# Altium PCB PCB2.PcbDoc
Units mil, origin at the board's own origin, x right, y up, seen from the top; angles counter-clockwise.
Board outline 4665 x 2010 mil, 2 copper layers (Top Layer, Bottom Layer); 13 components, 0 nets, 112 pads, 0 vias.
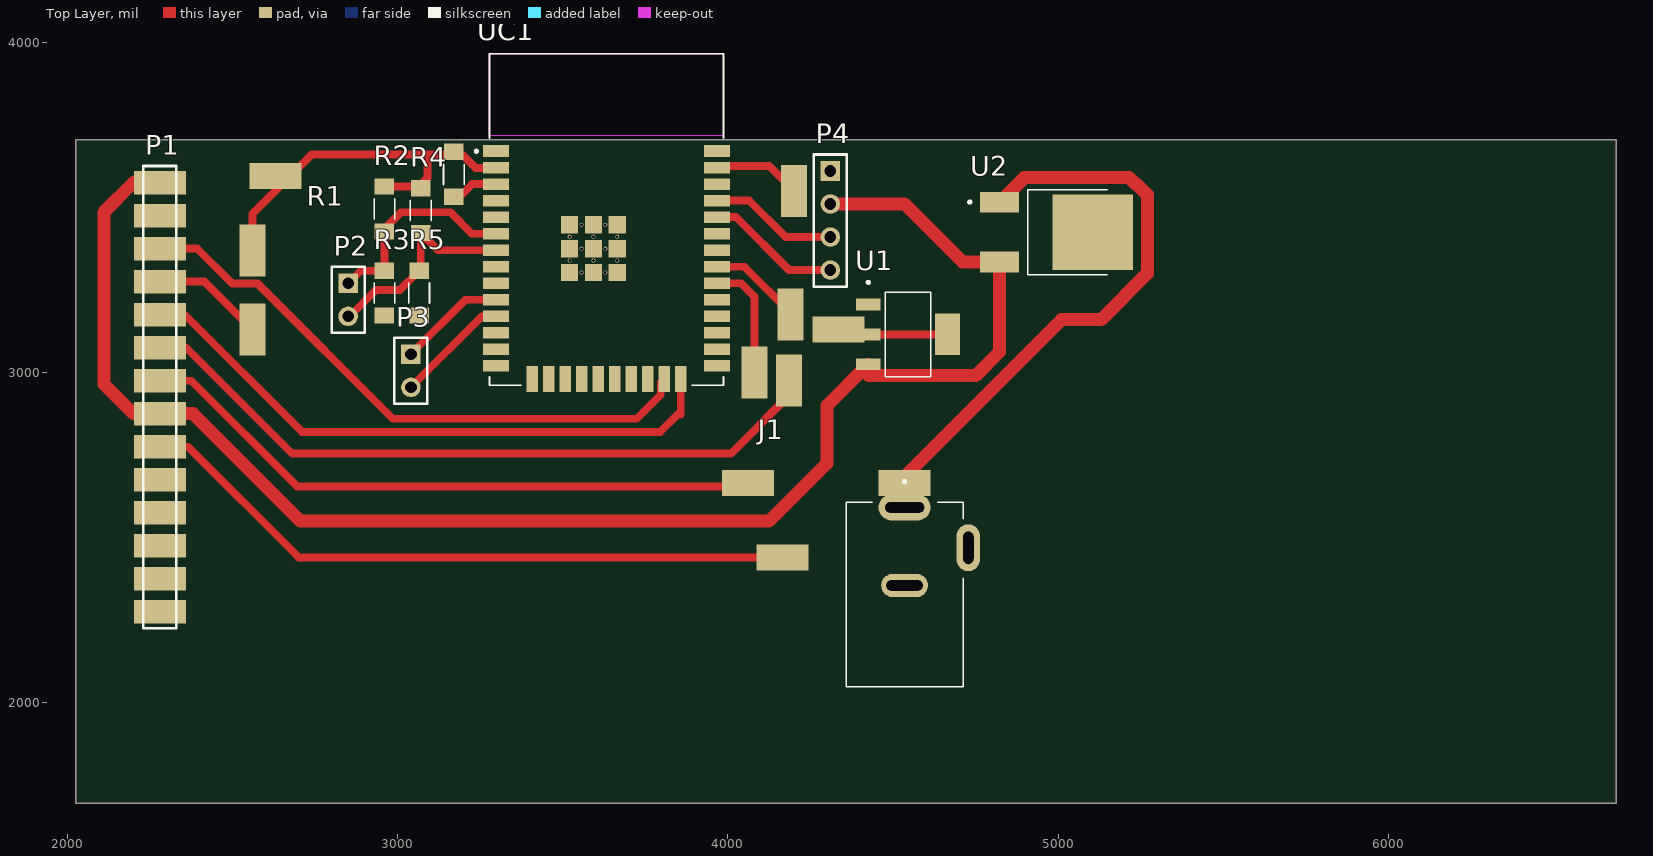
[diagram p0: Top Layer view]
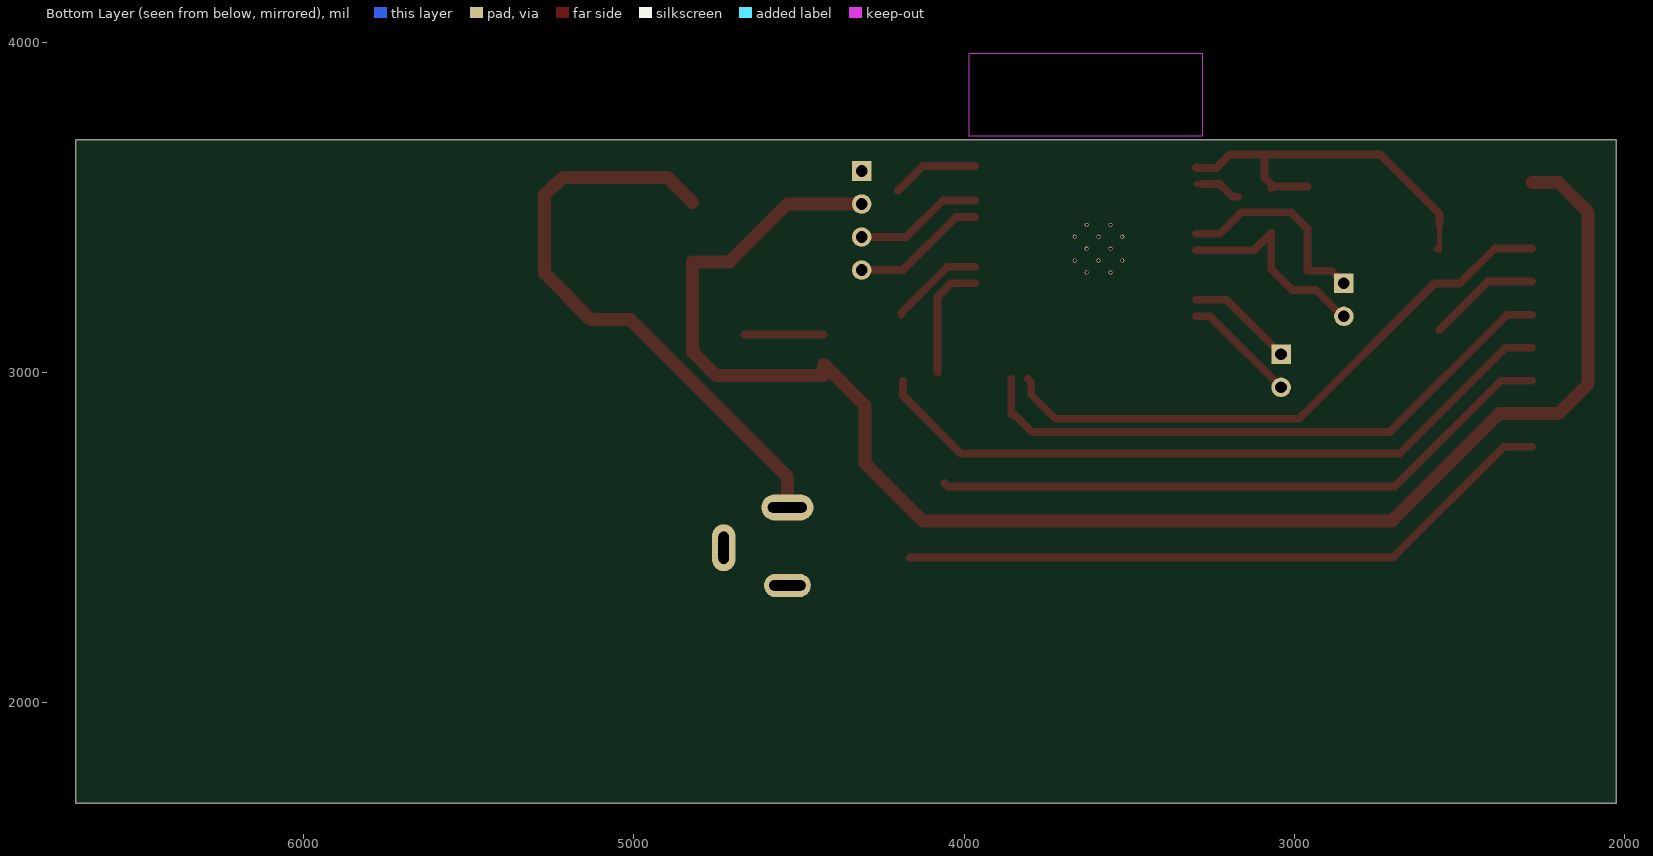
[diagram p1: Bottom Layer view, seen from below]

## Layer stack, top to bottom
Top Solder: solder mask 0.4, Solder Resist, Dk 3.5
Top Layer: signal copper 1.4
Dielectric 1: dielectric 12.6, FR-4, Dk 4.8
Bottom Layer: signal copper 1.4
Bottom Solder: solder mask 0.4, Solder Resist, Dk 3.5

## Board outline
2025,1695 6690,1695 6690,3705 2025,3705

## Design rules (kind name [scope] priority, off if disabled: settings)
Clearance [All] p1: gap=10 ignorepadtopadclearanceinfootprint=FALSE except(0: Arc-Hole Track-Hole SMDPad-Hole THPad-Hole Via-Hole Fill-Hole Poly-Hole Region-Hole Text-Hole)
PolygonConnect [All] p1: connectstyle=Relief reliefconductorwidth=10 reliefentries=4 polygonreliefangle="90 Angle" airgapwidth=10
RoomDefinition Sheet1 [InComponentClass('Sheet1')] p1: confinementstyle=ConfineIn formatcopy=TRUE lockcomponents=FALSE outline 2025,1700 6685,1700 6685,3705 2025,3705
RoutingVias [All] p1: holewidth=28 width=50 viastyle="Through Hole" minholewidth=28 minwidth=50 maxholewidth=28 maxwidth=50
SolderMaskExpansion [All] p1: expansion=4
Width [All] p1: maxlimit=10 minlimit=10 preferedwidth=10
30 further rules are at their usual default settings.

## Components (designator, comment, footprint, x,y, rotation, side; value= is the part's Value field where it differs from the comment)
J1 "PJ-050AH" CUI_PJ-050AH 4535,2591.22 r270 top
P1 "Header 14" HDR1X14 2280,3575 r270 top
P2 "ADC" HDR1X2 2850,3270 r270 top
P3 "DAC" HDR1X2 3040,3055 r270 top
P4 "Header 4" HDR1X4 4310,3610 r270 top
R1 "ERJU08J274V" RES_ERJU08J274V 3170,3600 r90 top
R2 "ERJU08J274V" RES_ERJU08J274V 2960,3495 r90 top
R3 "ERJU08J274V" RES_ERJU08J274V 2960,3240 r90 top
R4 "ERJU08J274V" RES_ERJU08J274V 3070,3490 r90 top
R5 "ERJU08J274V" RES_ERJU08J274V 3065,3240 r90 top
U1 "AP2111H-3.3TRG1" SOT230P700X180-4N 4545,3115 r270 top
U2 "MC78M05ABDTG" VREG_MC78M05ABDTG 4995.16,3425 r0 top
UC1 "ESP32-WROOM-32" MODULE_ESP32-WROOM-32 3632.13,3463.19 r0 top

## Footprints (in the part's own frame and the unit in brackets; to place one, negate y for a bottom-side part, rotate by r counter-clockwise, add the part's x,y. Pads: shape width x height; smd on the part's side, far side on the other; paste and mask are expansions set on the pad)
CUI_PJ-050AH [mm]
  oval 2x4 hole 0.8 slot 3 at 90 deg: 1(0,0)
  oval 1.8x3.6 hole 0.8 slot 2.8 at 90 deg: 2(6,0)
  oval 3.6x1.8 hole 0.8 slot 2.5 at 0 deg: 3(3.1,4.9)
  silkscreen extent -2.1,-4.5 13.8,4.5, body extent -4.5,-11.53 5.05,2.67, height 10.97
HDR1X2 [mm] "Connector; Header; 2 Position"
  rect 1.5x1.5 hole 0.9: 1(0,0)
  round 1.5 hole 0.9: 2(2.54,0)
  silkscreen extent -1.27,-1.27 3.81,1.27
HDR1X4 [mm] "Connector; Header; 4 Position"
  rect 1.5x1.5 hole 0.9: 1(0,0)
  round 1.5 hole 0.9: 2(2.54,0) 3(5.08,0) 4(7.62,0)
  silkscreen extent -1.27,-1.27 8.89,1.27
HDR1X14 [mm] "Connector; Header; 14 Position"
  rect 1.8x4 smd: 1(0,0) 2(2.54,0) 3(5.08,0) 4(7.62,0) 5(10.16,0) 6(12.7,0) 7(15.24,0) 8(17.78,0) 9(20.32,0) 10(22.86,0) 11(25.4,0) 12(27.94,0) 13(30.48,0) 14(33.02,0)
  silkscreen extent -1.27,-1.27 34.29,1.27
MODULE_ESP32-WROOM-32 [mm]
  rect 2x0.9 smd: 1(-8.5,5.26) 2(-8.5,3.99) 3(-8.5,2.72) 4(-8.5,1.45) 5(-8.5,0.18) 6(-8.5,-1.09) 7(-8.5,-2.36) 8(-8.5,-3.63) 9(-8.5,-4.9) 10(-8.5,-6.17) 11(-8.5,-7.44) 12(-8.5,-8.71) 13(-8.5,-9.98) 14(-8.5,-11.25) 25(8.5,-11.25) 26(8.5,-9.98) 27(8.5,-8.71) 28(8.5,-7.44) 29(8.5,-6.17) 30(8.5,-4.9) 31(8.5,-3.63) 32(8.5,-2.36) 33(8.5,-1.09) 34(8.5,0.18) 35(8.5,1.45) 36(8.5,2.72) 37(8.5,3.99) 38(8.5,5.26)
  rect 0.9x2 smd: 15(-5.715,-12.25) 16(-4.445,-12.25) 17(-3.175,-12.25) 18(-1.905,-12.25) 19(-0.635,-12.25) 20(0.635,-12.25) 21(1.905,-12.25) 22(3.175,-12.25) 23(4.445,-12.25) 24(5.715,-12.25)
  rect 1.33x1.33 smd: 39_1(-2.835,-0.405) 39_2(-1,-0.405) 39_3(0.835,-0.405) 39_4(-2.835,-2.24) 39_5(-1,-2.24) 39_6(0.835,-2.24) 39_7(-2.835,-4.075) 39_8(-1,-4.075) 39_9(0.835,-4.075)
  round 0.3 hole 0.2: 39_10(-1.917,-0.405) 39_11(-0.082,-0.405) 39_12(-2.835,-1.322) 39_13(-1,-1.322) 39_14(0.835,-1.322) 39_15(-1.917,-2.24) 39_16(-0.082,-2.24) 39_17(-2.835,-3.157) 39_18(-1,-3.157) 39_19(0.835,-3.157) 39_20(-1.917,-4.075) 39_21(-0.082,-4.075)
  Keep-Out Layer region: 9,6.45 -9,6.45 -9,12.75 9,12.75
  Keep-Out Layer region: 9,6.45 -9,6.45 -9,12.75 9,12.75
  silkscreen extent -10.1,-12.75 9,12.75, body extent -9,-12.75 9,12.75, height 3.2
RES_ERJU08J274V [mm]
  rect 1.25x1.5 smd: 1(-1.725,0) 2(1.725,0)
  silkscreen extent -0.78,-0.8 0.78,0.8
SOT230P700X180-4N [mm]
  rect 0.9x1.91 smd: 1(-2.3,-3.05) 2(0,-3.05) 3(2.3,-3.05)
  rect 3.19x1.91 smd: 4(0,3.05)
  silkscreen extent -4.1,-3.15 3.25,1.75, body extent -3.5,-3.25 3.5,3.25, height 1.65
VREG_MC78M05ABDTG [mm]
  rect 3x1.6 smd: 1(-4.39,2.29) 3(-4.39,-2.29)
  rect 6.2x5.8 smd paste-4: 2_4(2.79,0)
  silkscreen extent -6.78,-3.27 3.87,3.27

## Part data
J1: "2.0 x 6.0 mm, 5.0 A, Horizontal, Through Hole, Pick-n-Place Top, Dc Power Jack Connector", Package=None, Check_prices=https://www.snapeda.com/parts/PJ-050AH/Same+Sky/view-part/?ref=eda, MF="Same Sky", MP=PJ-050AH, SnapEDA_Link=https://www.snapeda.com/parts/PJ-050AH/Same+Sky/view-part/?ref=snap
P1: "Header, 14-Pin", LatestRevisionDate=17-Jul-2002, LatestRevisionNote="Re-released for DXP Platform.", Publisher="Altium Limited"
P2 P3: library part "Header 2", "Header, 2-Pin", LatestRevisionDate=17-Jul-2002, LatestRevisionNote="Re-released for DXP Platform.", Publisher="Altium Limited"
P4: "Header, 4-Pin", LatestRevisionDate=17-Jul-2002, LatestRevisionNote="Re-released for DXP Platform.", Publisher="Altium Limited"
R1 R2 R3 R4 R5 U2: Package=None, Availability=Unavailable, Price=None
  R1 R2 R3 R4 R5: MP=ERJU08J274V
  U2: MF="{'manufacturer': u'onsemi'}", MP=MC78M05ABDTG
U1: "Voltage Regulators, LDO, 600mA CMOS LDO 50mA 3.3V 250mV", Package="SOT-223 Diodes Inc.", Check_prices=https://www.snapeda.com/parts/AP2111H-3.3TRG1/Diodes+Inc./view-part/?ref=eda, MF="Diodes Inc.", MP=AP2111H-3.3TRG1, SnapEDA_Link=https://www.snapeda.com/parts/AP2111H-3.3TRG1/Diodes+Inc./view-part/?ref=snap
UC1: "Bluetooth, WiFi 802.11b/g/n, Bluetooth v4.2 +EDR, Class 1, 2 and 3 Transceiver Module 2.4GHz ~ 2.5GHz Antenna Not Included, U.FL Surface Mount", Package="Module Espressif Systems", Availability="In Stock", Check_prices=https://www.snapeda.com/parts/ESP32-WROOM-32/Espressif+Systems/view-part/?ref=eda, MF="Espressif Systems", MP=ESP32-WROOM-32, Price=None, Purchase-URL=https://pricing.snapeda.com/search/part/ESP32-WROOM-32/?ref=eda, SnapEDA_Link=https://www.snapeda.com/parts/ESP32-WROOM-32/Espressif+Systems/view-part/?ref=snap

## Free pads (board coordinates)
  rect 78.74x157.48 smd: 2(2560,3130) 3(2560,3370) 4(4200,3550) 5(4185,2975) 6(4190,3175) 7(4080,3000)
  rect 157.48x78.74 smd: 8(4060,2665) 9(4165,2440) 10(4335,3130) 11(2630,3595) 12(4535,2665)

## Nets (pads, with @x,y where several pads share a name; then routed paths per layer and width w, separated by ;. In a path a pad name is that pad's centre, name@x,y a point inside that pad or via, vN(x,y) a via of type N, cw(c..) or ccw(c..) an arc to the next point about the centre after c; other vN are vias at no path point)
pads on no net: J1.1 J1.2 J1.3 P1.1 P1.2 P1.3 P1.4 P1.5 P1.6 P1.7 P1.8 P1.9 P1.10 P1.11 P1.12 P1.13 P1.14 P2.1 P2.2 P3.1 P3.2 P4.1 P4.2 P4.3 P4.4 R1.1 R1.2 R2.1 R2.2 R3.1 R3.2 R4.1 R4.2 R5.1 R5.2 U1.1 U1.2 U1.3 U1.4 U2.1 U2.2_4 U2.3 UC1.1 UC1.2 UC1.3 UC1.4 UC1.5 UC1.6 UC1.7 UC1.8 UC1.9 UC1.10 UC1.11 UC1.12 UC1.13 UC1.14 UC1.15 UC1.16 UC1.17 UC1.18 UC1.19 UC1.20 UC1.21 UC1.22 UC1.23 UC1.24 UC1.25 UC1.26 UC1.27 UC1.28 UC1.29 UC1.30 UC1.31 UC1.32 UC1.33 UC1.34 UC1.35 UC1.36 UC1.37 UC1.38 UC1.39_1 UC1.39_2 UC1.39_3 UC1.39_4 UC1.39_5 UC1.39_6 UC1.39_7 UC1.39_8 UC1.39_9 UC1.39_10 UC1.39_11 UC1.39_12 UC1.39_13 UC1.39_14 UC1.39_15 UC1.39_16 UC1.39_17 UC1.39_18 UC1.39_19 UC1.39_20 UC1.39_21
copper on no net: | length 21982.9
  Top Layer w15.75: 2560,3450 2560,3370 2571.14,3373.39 2570.08,3375.38 2567.73,3377.73 ; 2960,3562.91 2965,3557.91 ; 3070,3557.91 3070,3570 ; 3280,3570.28 3297.48,3570.28
  Top Layer w23.62: 2280,2775 2365,2775 2700,2440 4165,2440 ; 2280,2975 2375,2975 2695,2655 4050,2655 4060,2665 ; 2280,3075 2360,3075 2680.75,2754.25 4009.25,2754.25 4185,2930 4185,2975 ; 2280,3175 2355,3175 2710,2820 3795,2820 3847.87,2872.87 3857.13,2872.87 3857.13,2980.91 ; 2280,3275 2415,3275 2560,3130 ; 2280,3375 2393.27,3375 2498.82,3269.45 2575.55,3269.45 2985,2860 3724.15,2860 3796.65,2932.5 3796.65,2970.43 3807.13,2980.91 ; 2560,3450 2560,3480 2740,3660 3090,3660 ; 2850,3170 2855,3170 2935,3250 3007.09,3250 3065,3307.91 3070,3312.91 3070,3422.09 3121.81,3370.28 3297.48,3370.28 ; 2850,3270 2887.91,3307.91 2960,3307.91 2960,3427.09 2960,3435 3010,3485 3160,3485 3224.72,3420.28 3297.48,3420.28 ; 2960,3562.91 3065,3562.91 3070,3557.91 ; 3040,2955 3255.28,3170.28 3297.48,3170.28 ; 3040,3055 3205.28,3220.28 3297.48,3220.28 ; 3070,3570 3090,3590 3090,3660 ; 3170,3532.09 3187.09,3532.09 3225.28,3570.28 3280,3570.28 ; 3297.48,3620.28 3296.69,3619.49 3235.51,3619.49 3195,3660 3090,3660 ; 3966.77,3270.28 4039.72,3270.28 4080,3230 4080,3000 ; 3966.77,3320.28 4049.72,3320.28 4190,3180 4190,3175 ; 3966.77,3470.28 4024.72,3470.28 4185,3310 4310,3310 ; 3966.77,3520.28 4064.72,3520.28 4175,3410 4310,3410 ; 3966.77,3625 4125,3625 4200,3550 ; 4424.92,3115 4665.08,3115
  Top Layer w39.37: 2280,3575 2200,3575 2110,3485 2110,2965 2200,2875 2280,2875 2380,2875 2705,2550 4125,2550 4300,2725 4300,2899.53 4424.92,3024.45 4424.92,2990.08 4750.08,2990.08 4822.32,3062.32 4822.32,3334.84 4710.16,3334.84 4535,3510 4310,3510 ; 4535,2591.22 4535,2665 4535,2685 5010,3160 5130,3160 5270,3300 5270,3538.2 5239.34,3568.86 5236.14,3568.86 5215,3590 4897.17,3590 4822.32,3515.16

## Polygon pours and split planes (outlines as drawn)
no net on Top Layer "Top Layer-No Net" (solid, shelved, pour order 0): 2025,1695 6690,1695 6690,3705 2025,3705

## Text inside footprints (layer, text, board x,y; h text height)
UC1: Mechanical 13 "ANTENNA" at 3395.91,3817.52 h70